# Altium PCB Devkit_board.PcbDoc
Units mil, origin at the board's own origin, x right, y up, seen from the top; angles counter-clockwise.
Board outline 5015 x 5010 mil, 4 copper layers (Top Layer, GND02, PWR03, Bottom Layer), stack 23.756 mil thick; 83 components, 55 nets, 413 pads, 0 vias.
Unrouted connection lines stored in the file: 203.
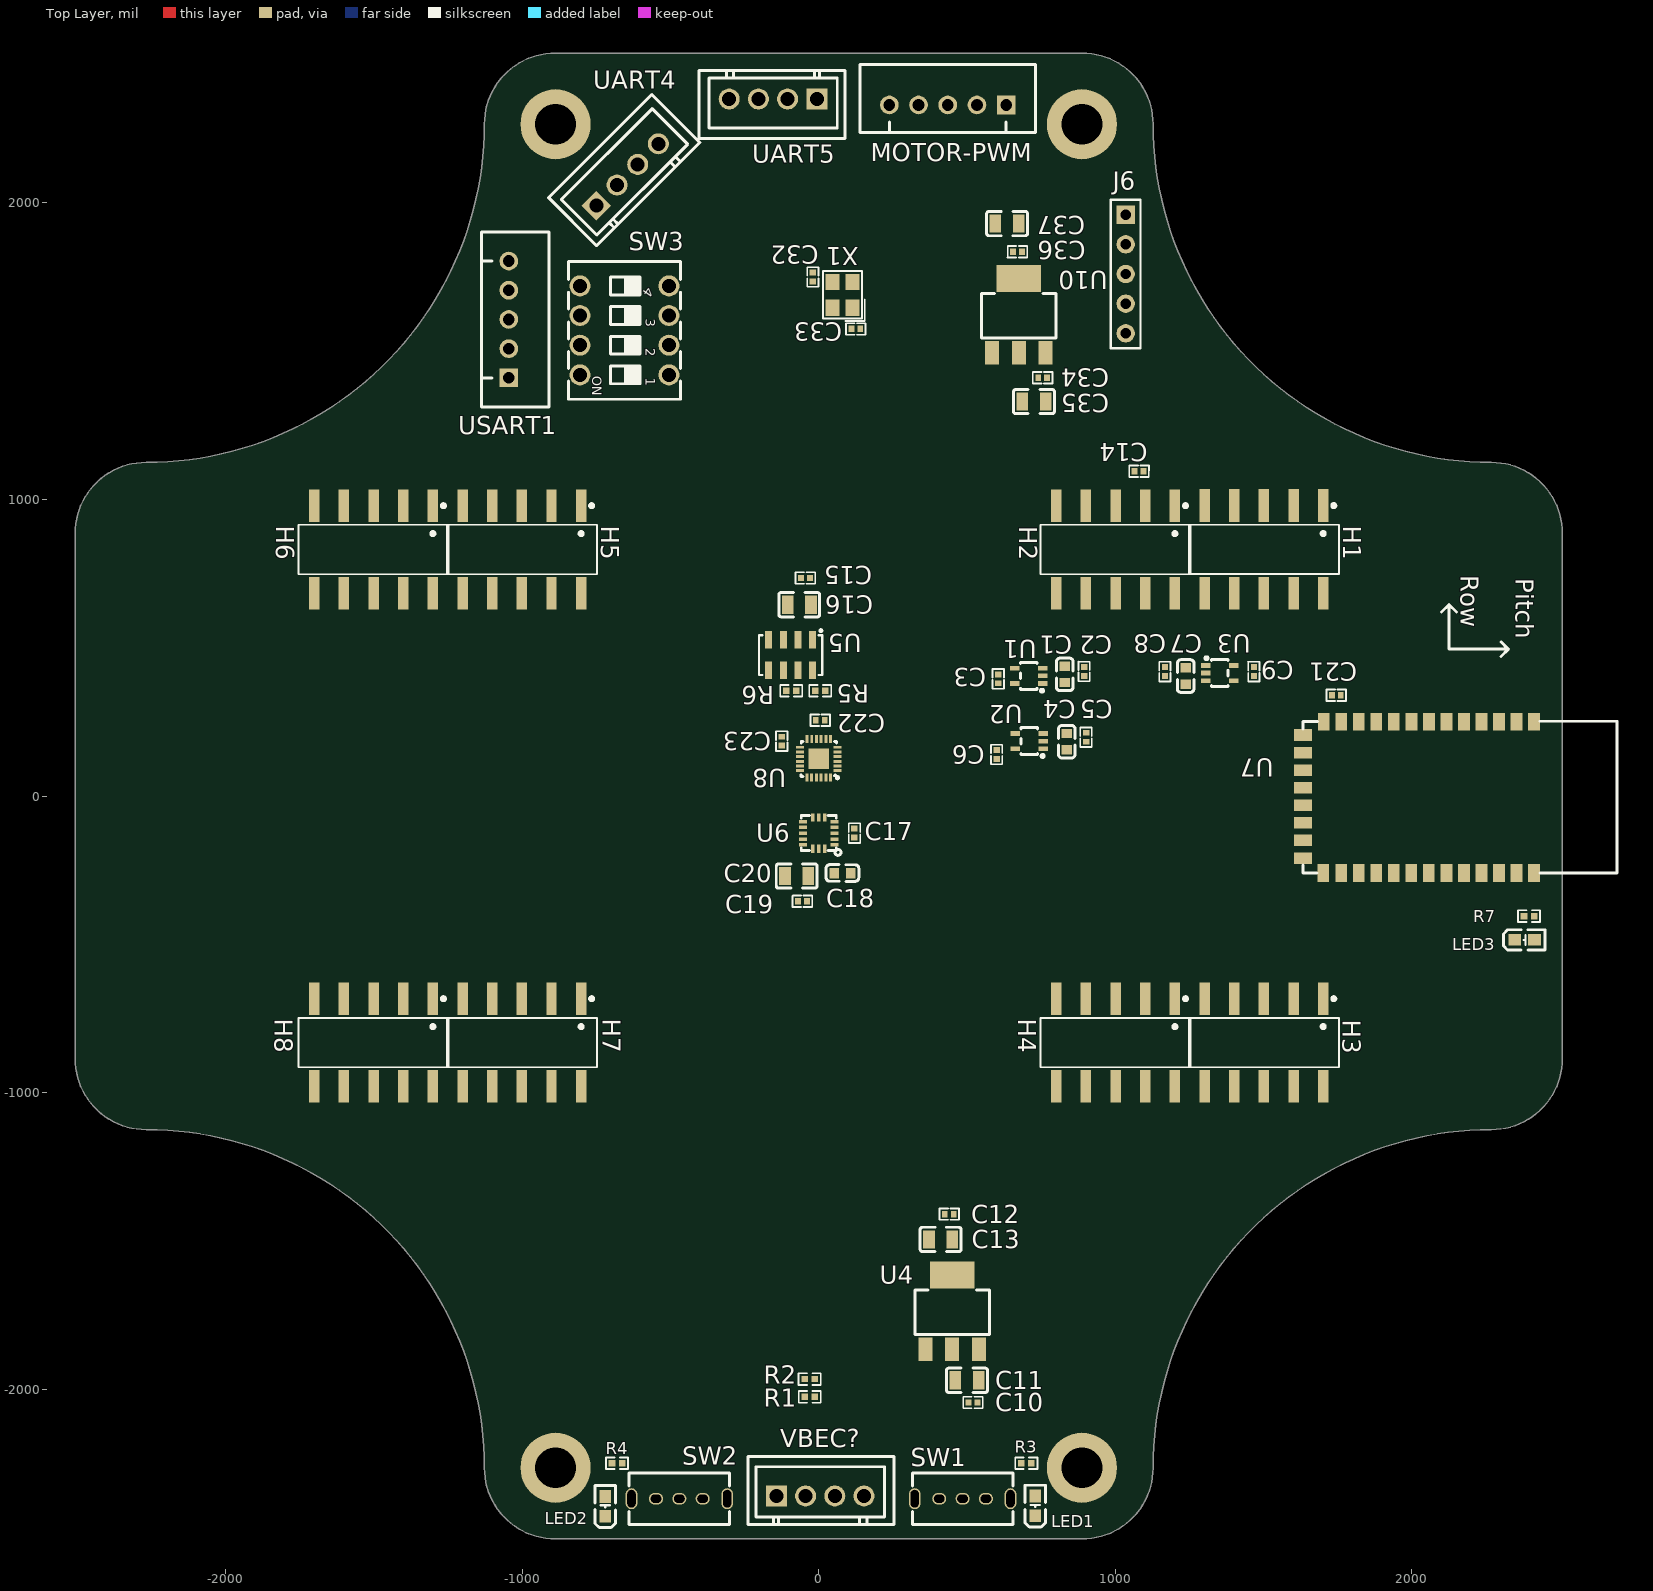
[diagram p0: Top Layer view]
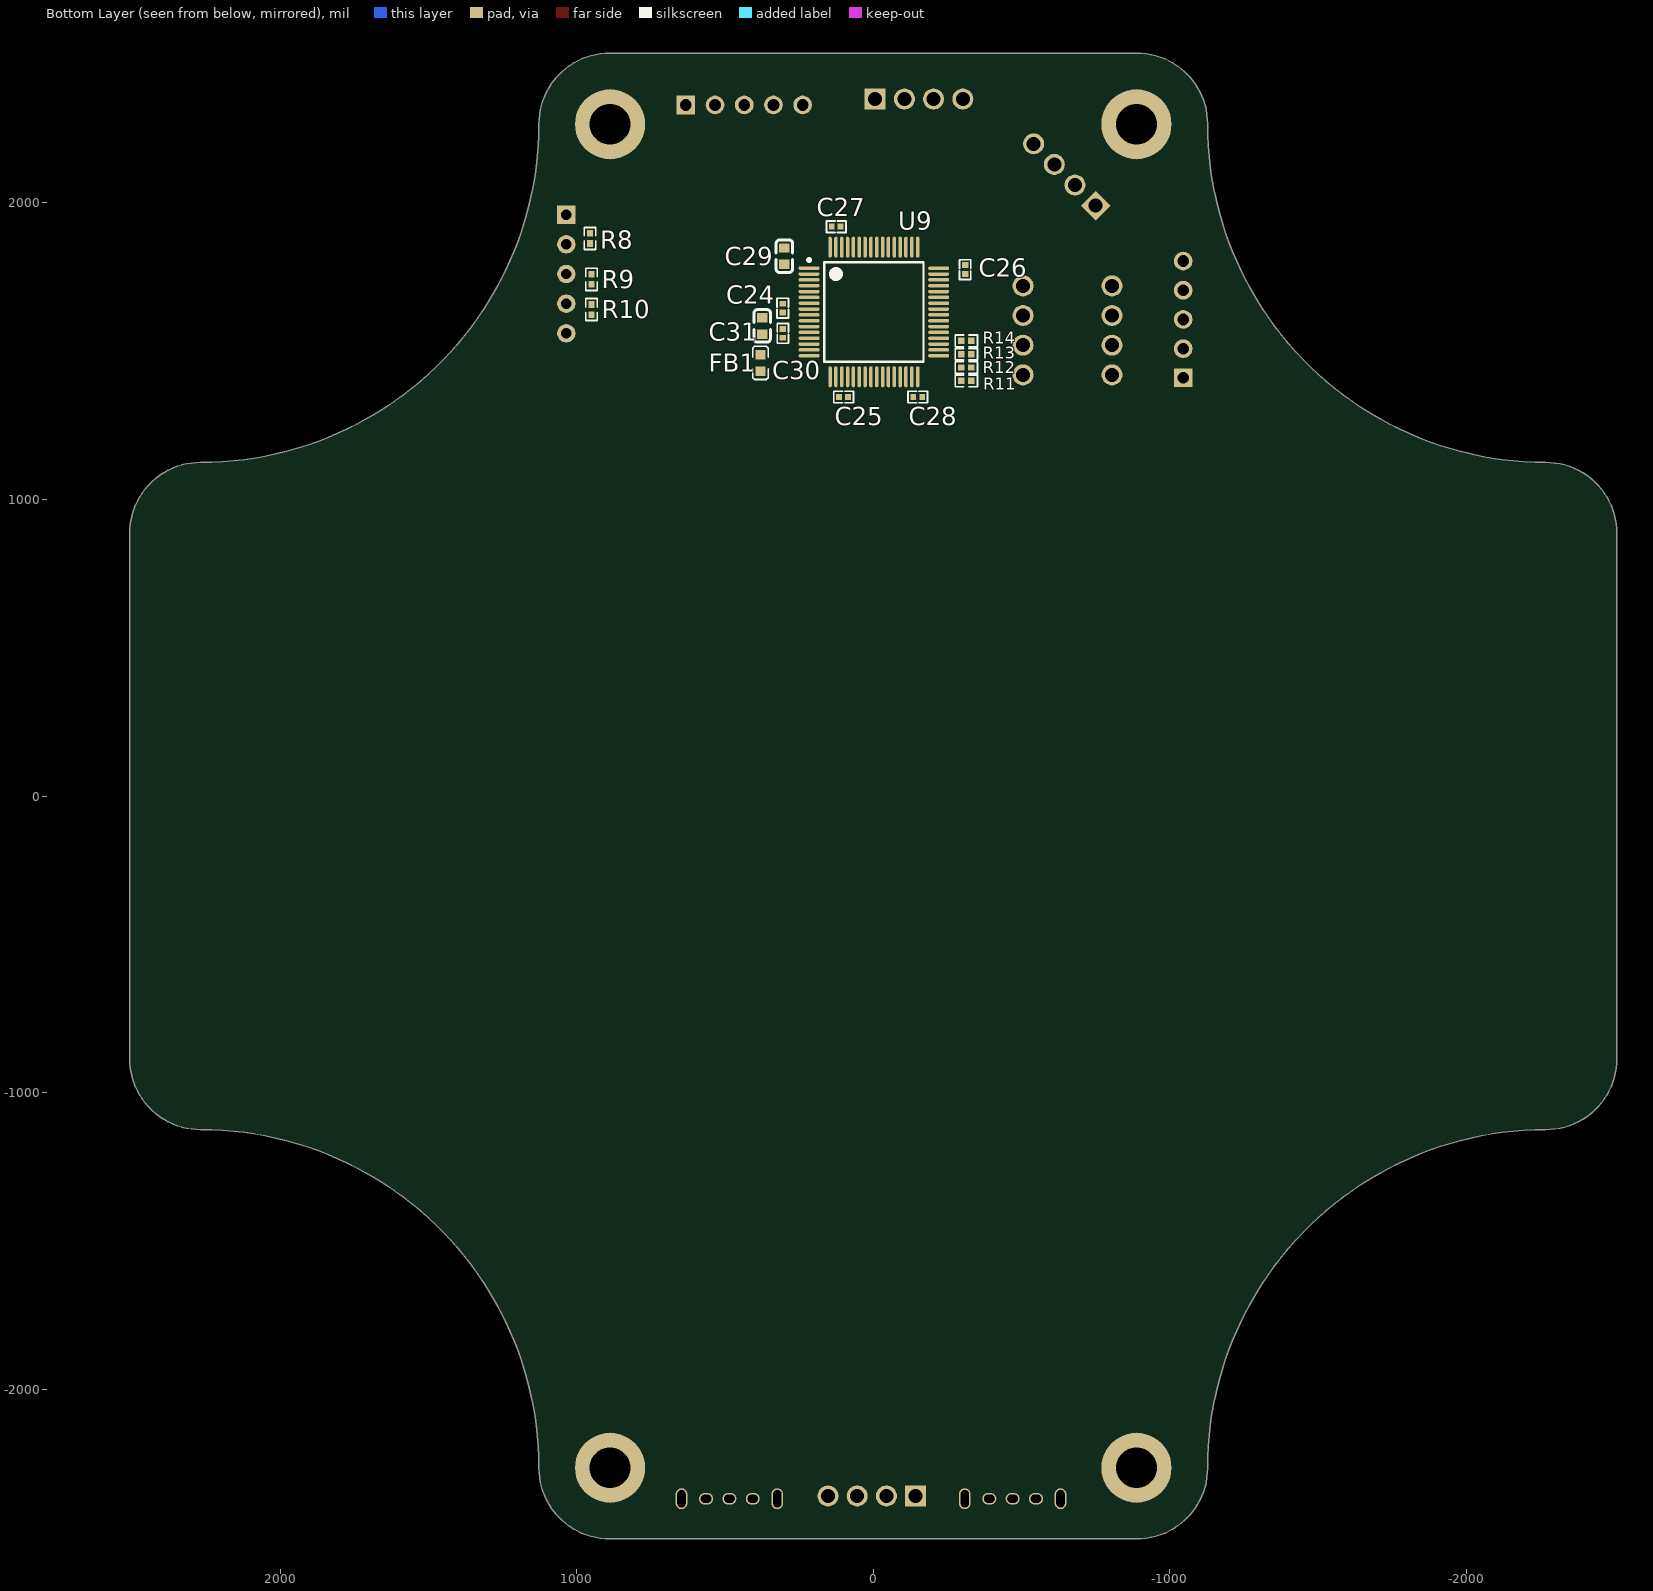
[diagram p1: Bottom Layer view, seen from below]
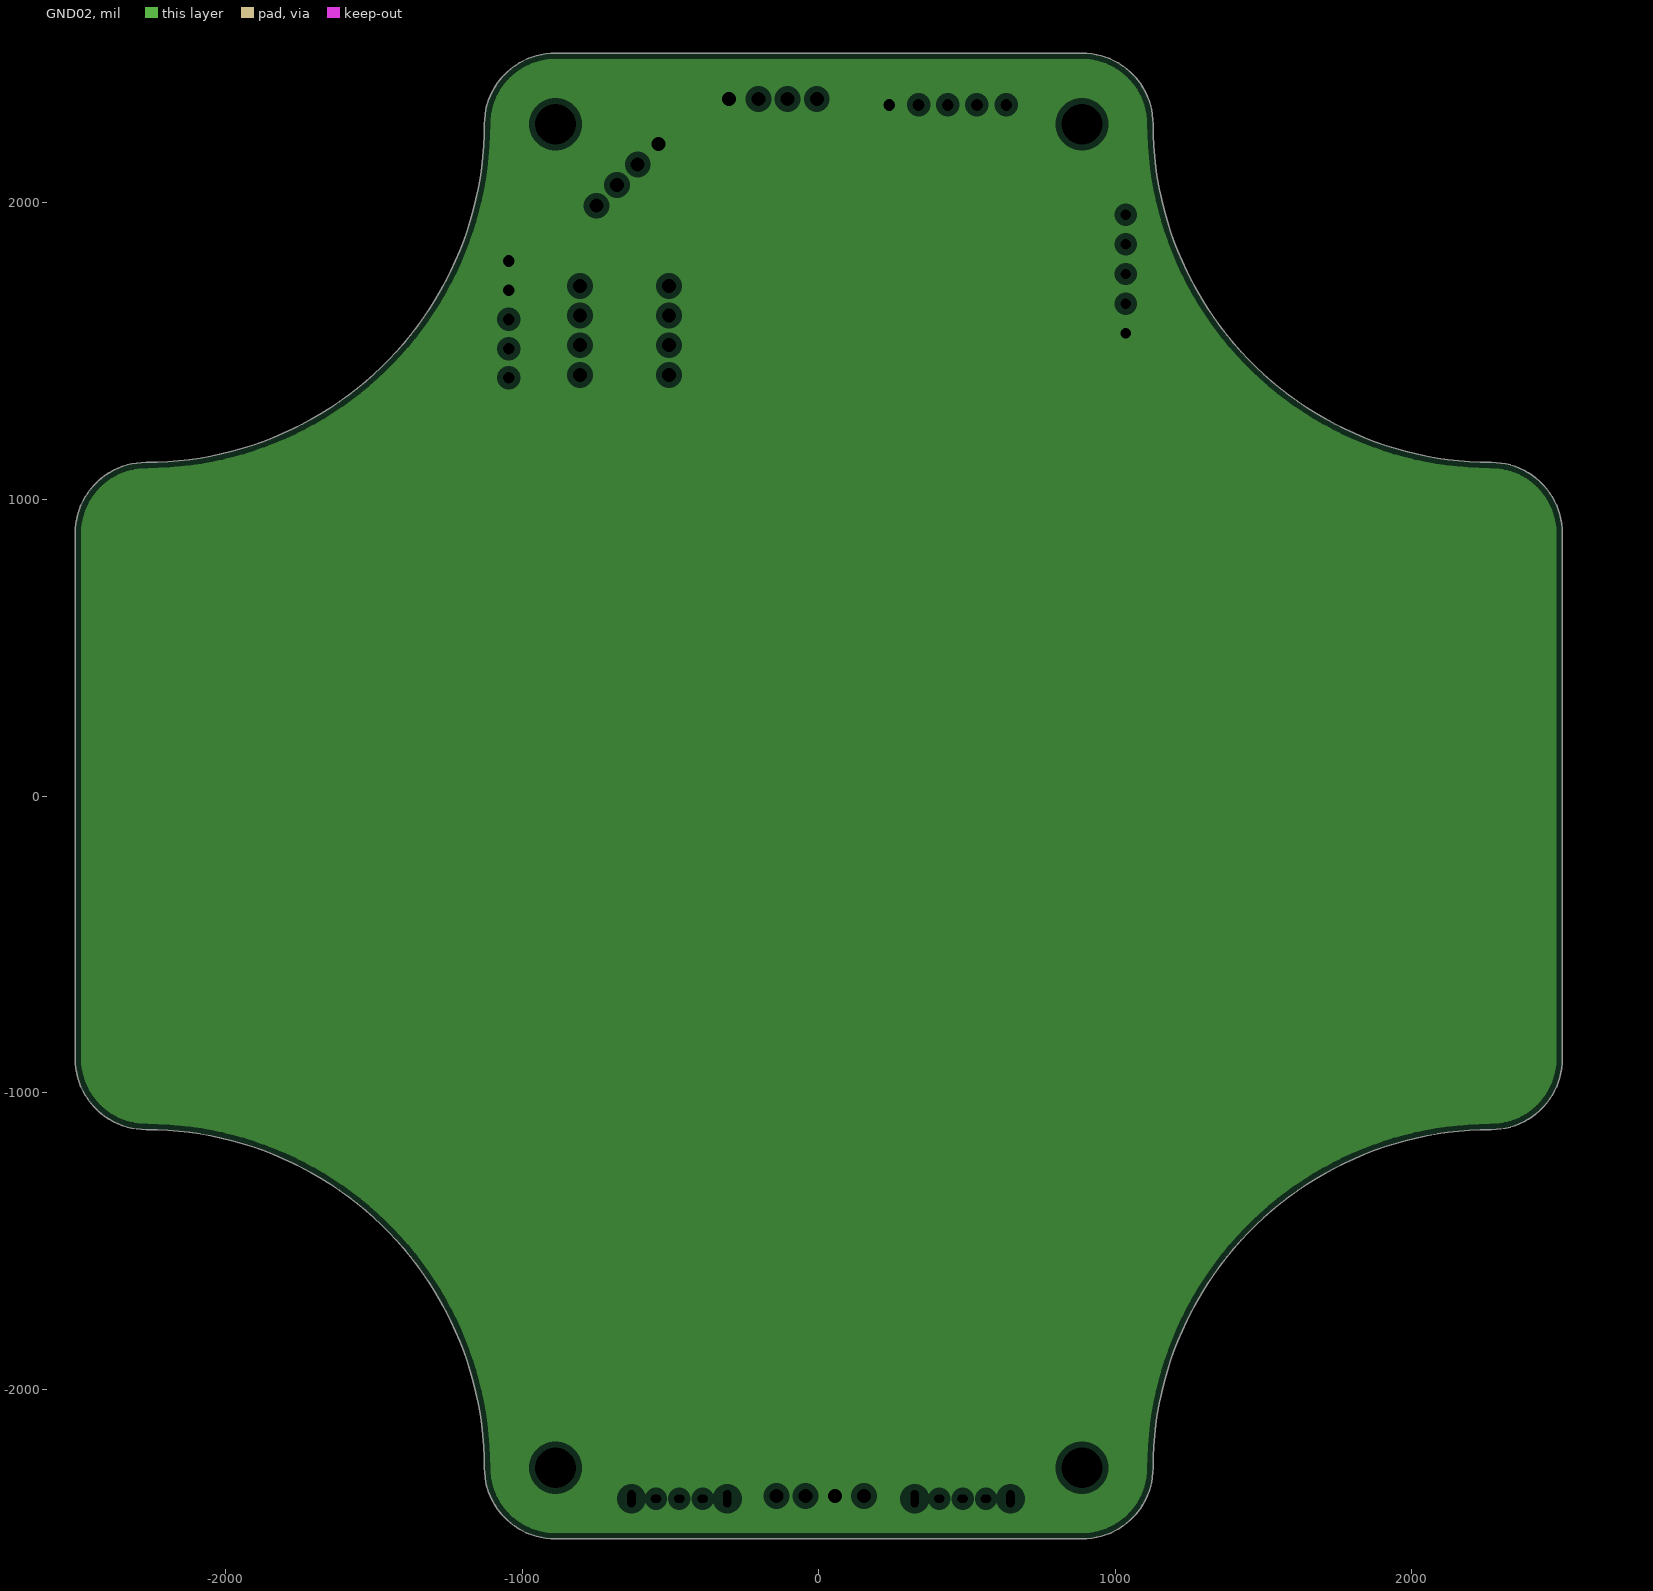
[diagram p2: GND02, clearances drawn from the general rule]
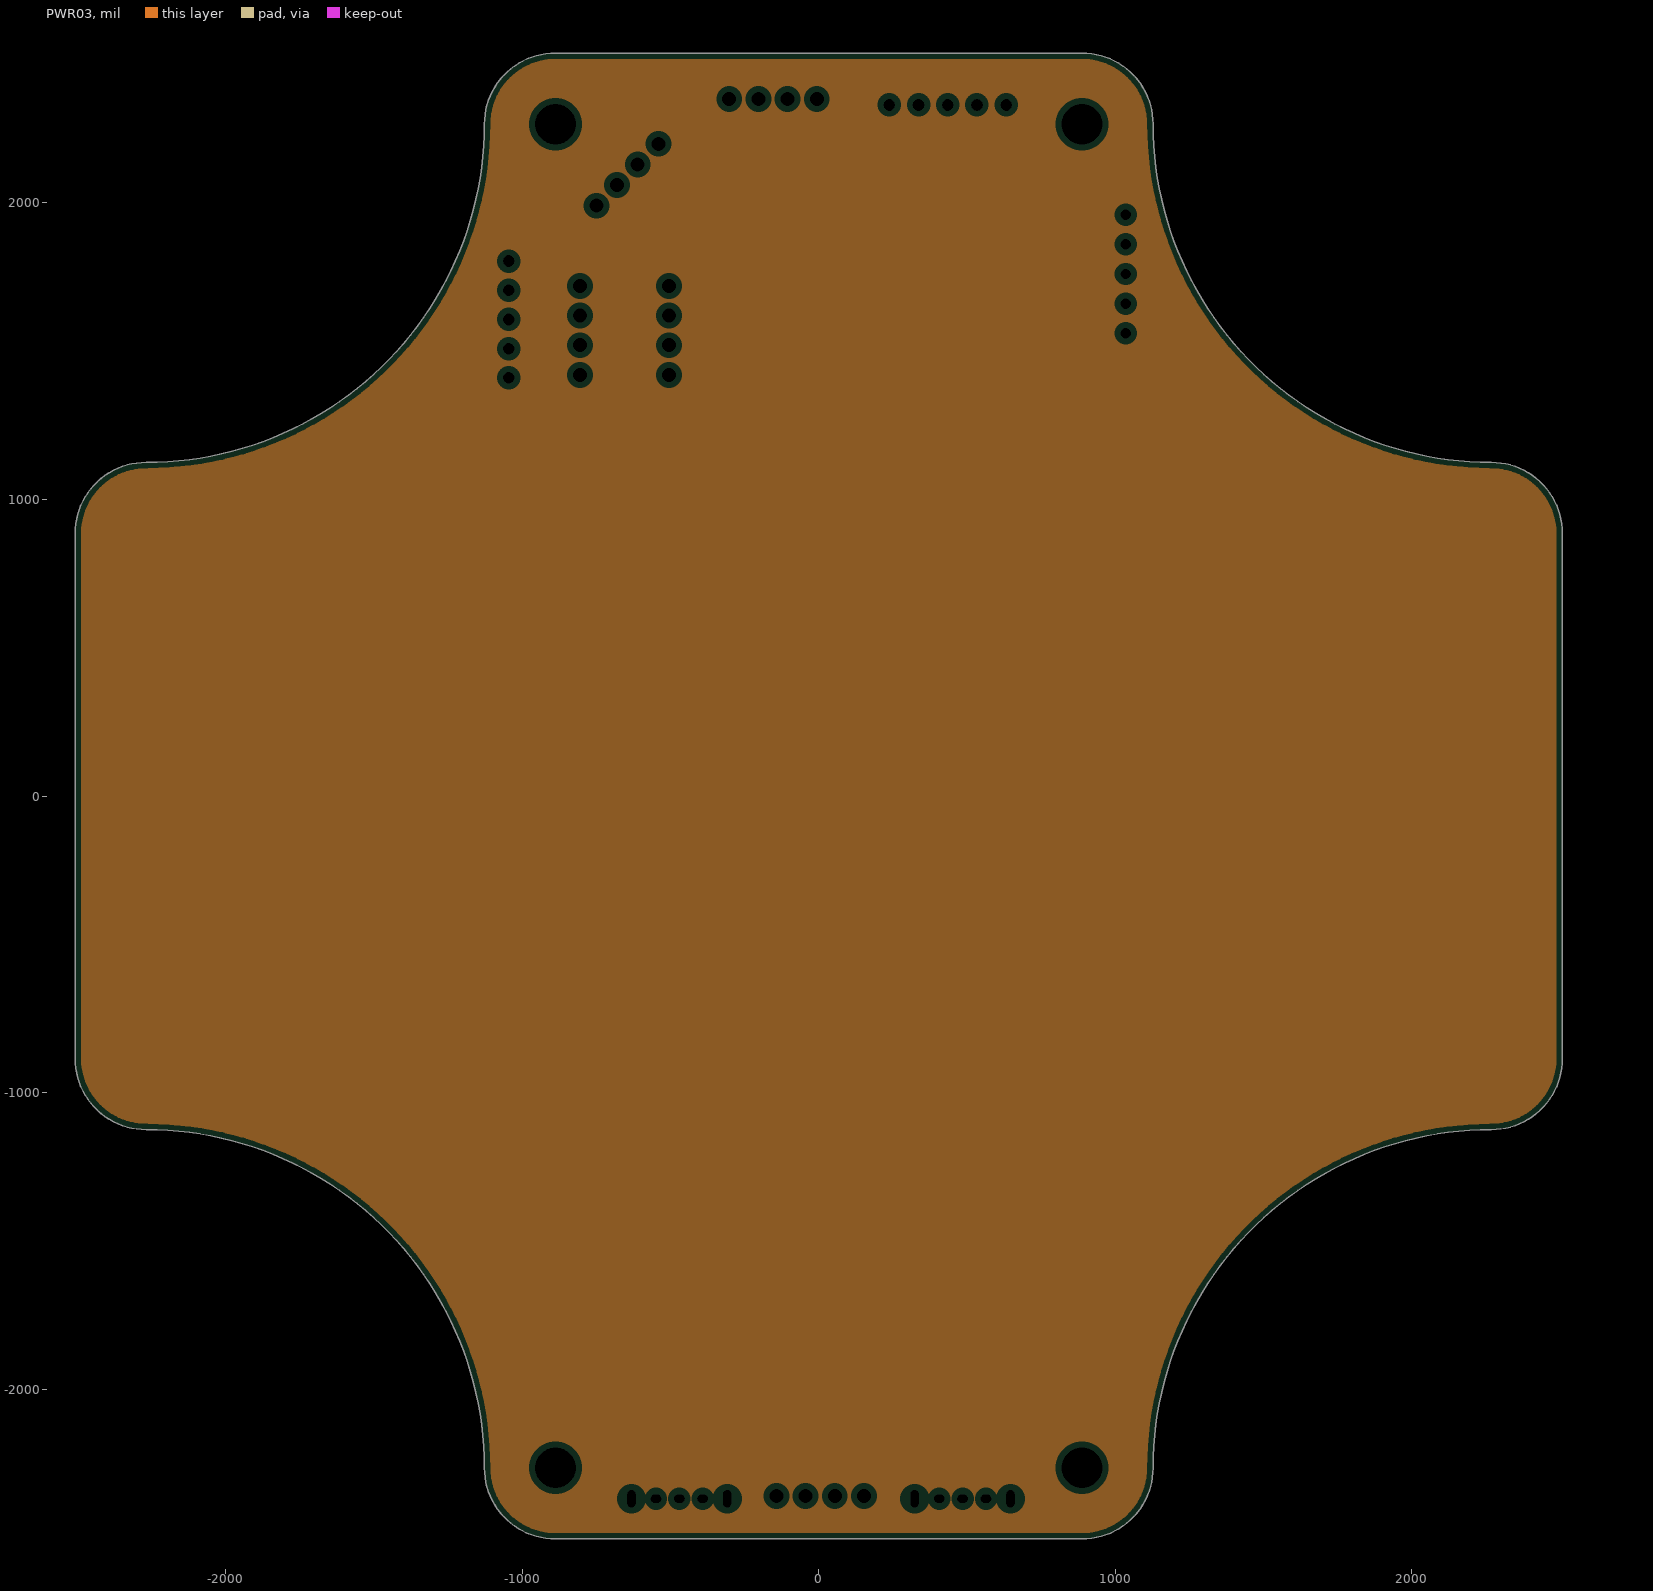
[diagram p3: PWR03, clearances drawn from the general rule]

## Layer stack, top to bottom
Top Solder: solder mask 0.4, Solder Resist, Dk 3.5
Top Layer: signal copper 1.4
Dielectric 2: prepreg 2.8, PP-006, Dk 4.1
GND02: plane copper 1.378, net GND
Dielectric 1: dielectric 12.6, FR-4, Dk 4.8
PWR03: plane copper 1.378
Dielectric 3: prepreg 2.8, PP-006, Dk 4.1
Bottom Layer: signal copper 1.4
Bottom Solder: solder mask 0.4, Solder Resist, Dk 3.5

## Board outline
-1127.5,-2265 ccw(c-887.5,-2265) -887.5,-2505 887.5,-2505 ccw(c887.5,-2265) 1127.5,-2265 cw(c2267.5,-2265) 2267.5,-1125 ccw(c2267.5,-885) 2507.5,-885 2507.5,885 ccw(c2267.5,885) 2267.5,1125 cw(c2267.5,2265) 1127.5,2265 ccw(c887.5,2265) 887.5,2505 -887.5,2505 ccw(c-887.5,2265) -1127.5,2265 cw(c-2267.5,2265) -2267.5,1125 ccw(c-2267.5,885) -2507.5,885 -2507.5,-885 ccw(c-2267.5,-885) -2267.5,-1125 cw(c-2267.5,-2265)

## Design rules (kind name [scope] priority, off if disabled: settings)
Clearance Clearance_1 [All] p1: gap=10 ignorepadtopadclearanceinfootprint=FALSE except(0: Arc-Hole Track-Hole SMDPad-Hole THPad-Hole Via-Hole Fill-Hole Poly-Hole Region-Hole Text-Hole)
Clearance [All] p2: gap=10 ignorepadtopadclearanceinfootprint=FALSE except(0: Arc-Hole Track-Hole SMDPad-Hole THPad-Hole Via-Hole Fill-Hole Poly-Hole Region-Hole Text-Hole)
PlaneClearance [All] p1: clearance=20
PlaneConnect [All] p1: planeconnectstyle=Relief reliefexpansion=20 reliefentries=4 reliefconductorwidth=10 reliefairgap=10
PolygonConnect [All] p1: connectstyle=Relief reliefconductorwidth=10 reliefentries=4 polygonreliefangle="90 Angle" airgapwidth=10
RoutingVias [All] p1: holewidth=28 width=50 viastyle="Through Hole" minholewidth=28 minwidth=50 maxholewidth=28 maxwidth=50
SolderMaskExpansion [All] p1: expansion=4 istentingtop=FALSE
Width [All] p1: maxlimit=10 minlimit=10 preferedwidth=10
28 further rules are at their usual default settings.

## Classes and differential pairs
component class stm32_core: C24 C25 C26 C27 C28 C29 C30 C31 C32 C33 C34 C35 C36 C37 FB1 J6 R8 R9 R10 R11 R12 R13 R14 SW3 U9 U10 UART4 UART5 USART1 X1
component class IMU: C1 C2 C3 C4 C5 C6 C7 C8 C9 C10 C11 C12 C13 C14 C15 C16 C17 C18 C19 C20 C21 C22 C23 H1 H2 H3 H4 H5 H6 H7 H8 LED1 LED2 LED3 MOTOR-PWM R1 R2 R3 R4 R5 R6 R7 SW1 SW2 U1 U2 U3 U4 U5 U6 U7 U8 VBEC?

## Components (designator, comment, footprint, x,y, rotation, side; value= is the part's Value field where it differs from the comment)
C1 "4.7uF" C0603 830,410 r90 top
C2 "100nF" C0402 895,420 r90 top
C3 "1uF" C0402 605,395 r270 top
C4 "4.7uF" C0603 836.51,183.15 r90 top
C5 "100nF" C0402 901.51,198.15 r90 top
C6 "1uF" C0402 600,140 r90 top
C7 "4.7uF" C0603 1237.44,404.52 r90 top
C8 "100nF" C0402 1167.44,419.52 r90 top
C9 "1uF" C0402 1467.44,419.52 r90 top
C10 "100nF" C0402 520,-2045 r0 top
C11 "10uF" C0805 500,-1970 r0 top
C12 "100nF" C0402 440,-1410 r0 top
C13 "10uF" C0805 410.94,-1495 r0 top
C14 "100nF" C0402 1080,1095 r0 top
C15 "100nF" C0402 -45,735 r0 top
C16 "10uF" C0805 -65.63,645 r0 top
C17 "220nF" C0402 120,-125 r270 top
C18 "4.7uF" C0603 80,-260 r0 top
C19 "100nF" C0402 -55,-355 r0 top
C20 "10uF" C0805 -74.37,-270 r0 top
C21 "100nF" C0402 1745,340 r180 top
C22 "100nF" C0402 5,255 r0 top
C23 "1uF" C0402 -125,185 r270 top
C24 "100nF" C0402 305,1645 r90 bottom
C25 "100nF" C0402 100,1345 r180 bottom
C26 "100nF" C0402 -310,1775 r90 bottom
C27 "100nF" C0402 125,1920 r0 bottom
C28 "100nF" C0402 -150,1345 r180 bottom
C29 "22uF" C0603 300,1820 r270 bottom
C30 "100nF" C0402 305,1560 r270 bottom
C31 "22uF" C0603 375,1585 r270 bottom
C32 "12pF" C0402 -20,1750 r270 top
C33 "12pF" C0402 125,1575 r180 top
C34 "100nF" C0402 755,1410 r0 top
C35 "10uF" C0805 725.63,1330 r0 top
C36 "100nF" C0402 670,1835 r0 top
C37 "10uF" C0805 635,1930 r0 top
FB1 "100Ω" L0603 380,1460 r90 bottom
H1 "95278-101A10LF" HDR-SMD_10P-P2.54-V-R2-C5-S7.3 1501.02,831.34 r180 top
H2 "95278-101A10LF" HDR-SMD_10P-P2.54-V-R2-C5-S7.3 1001.02,831.14 r180 top
H3 "95278-101A10LF" HDR-SMD_10P-P2.54-V-R2-C5-S7.3 1501.02,-831.18 r180 top
H4 "95278-101A10LF" HDR-SMD_10P-P2.54-V-R2-C5-S7.3 1001.02,-831.18 r180 top
H5 "95278-101A10LF" HDR-SMD_10P-P2.54-V-R2-C5-S7.3 -1001.02,831.14 r180 top
H6 "95278-101A10LF" HDR-SMD_10P-P2.54-V-R2-C5-S7.3 -1501.02,831.14 r180 top
H7 "95278-101A10LF" HDR-SMD_10P-P2.54-V-R2-C5-S7.3 -1001.02,-831.18 r180 top
H8 "95278-101A10LF" HDR-SMD_10P-P2.54-V-R2-C5-S7.3 -1501.02,-831.18 r180 top
J6 "HDR-M-2.54_1x5" HDR-M-2.54_1X5 1035,1760 r270 top
LED1 "19-217/BHC-ZL1M2RY/3T" LED0603-R-RD 730,-2393.5 r90 top
LED2 "19-217/BHC-ZL1M2RY/3T" LED0603-R-RD -720,-2395 r90 top
LED3 "19-217/BHC-ZL1M2RY/3T" LED0603-R-RD 2380,-485 r0 top
MOTOR-PWM "XH-5A" CONN-TH_5P-P2.50_XH-5A_C2318 435,2330 r180 top
R1 "3.9M" R0402 -30.32,-2025.95 r0 top
R2 "1M" R0402 -30.63,-1965.95 r0 top
R3 "1K" R0402 700,-2250 r180 top
R4 "1K" R0402 -680,-2250 r0 top
R5 "4.7K" R0402 5,355 r0 top
R6 "4.7K" R0402 -92.96,355 r180 top
R7 "1K" R0402 2395,-405 r180 top
R8 "10K" R0402 955,1880 r90 bottom
R9 "10K" R0402 950,1742.04 r270 bottom
R10 "10K" R0402 950,1640 r270 bottom
R11 "10K" R0402 -313.91,1399.63 r0 bottom
R12 "10K" R0402 -313.91,1444.63 r0 bottom
R13 "10K" R0402 -313.91,1489.63 r0 bottom
R14 "10K" R0402 -313.91,1534.63 r0 bottom
SW1 "主控电源开关" SW-TH_SK-12D02VG3 485,-2369.39 r0 top
SW2 "视觉电源开关" SW-TH_SK-12D02VG3 -470,-2369.39 r0 top
SW3 "DSWB04LHGET" SW-TH_DSWB04LHGET -655,1570 r90 top
U1 "TLV70033" SC-70-5_L2.1-W1.3-P0.65-LS2.1-BR 707.76,405 r0 top
U2 "TLV70033" SC-70-5_L2.1-W1.3-P0.65-LS2.1-BR 710,185 r0 top
U3 "TLV70033" SC-70-5_L2.1-W1.3-P0.65-LS2.1-BR 1352.44,414.52 r180 top
U4 "TLV1117-3.3V" SOT-223-4_L6.5-W3.5-P2.30-LS7.0-BR 450,-1740 r270 top
U5 "MS5611-01BA03" SENSORS-SMD_MS5611-01BA03 -95,475 r270 top
U6 "LSM303D" LGA16-0.5-3X3MM 0,-125 r180 top
U7 "HC06" "HC-06 MODULE" 1633.1,-209.8 r180 top
U8 "MPU6500" QFN-24_L3.0-W3.0-P0.40-BL-EP 0.05,126.95 r90 top
U9 "STM32F103RCT6" STM-LQFP64_N -2.06,1632.06 r180 bottom
U10 "TLV1117-3.3V" SOT-223-4_L6.5-W3.5-P2.30-LS7.0-BR 674.45,1620 r270 top
UART4 "XH-4A" CONN-TH_4P-P2.50_XH-4A -645.25,2094.75 r45 top
UART5 "XH-4A" CONN-TH_4P-P2.50_XH-4A -154.15,2350 r180 top
USART1 "XH-5A" CONN-TH_5P-P2.50_XH-5A_C2318 -1045,1606.85 r90 top
VBEC? "XH-4A" CONN-TH_4P-P2.50_XH-4A 4.84,-2360 r0 top
X1 "8MHz" OSC-SMD_4P-L3.2-W2.5-BL 80,1690 r90 top

## Footprints (in the part's own frame and the unit in brackets; to place one, negate y for a bottom-side part, rotate by r counter-clockwise, add the part's x,y. Pads: shape width x height; smd on the part's side, far side on the other; paste and mask are expansions set on the pad)
C0402 [mm]
  rect 0.5x0.54 smd: 1(-0.381,0) 2(0.381,0)
  silkscreen extent -0.84,-0.48 0.84,0.5
C0603 [mm]
  rect 0.8x0.9 smd: 1(-0.7,0) 2(0.7,0)
  silkscreen extent -1.4,-0.7 1.4,0.72
C0805 [mm]
  rect 1x1.55 smd: 1(-1,0) 2(1,0)
  silkscreen extent -1.75,-1.04 1.75,1.04
CONN-TH_4P-P2.50_XH-4A [mm]
  rect 1.8x1.8 hole 1.199: 1(-3.75,0)
  round 1.8 hole 1.199: 2(-1.248,0) 3(1.251,0) 4(3.75,0)
  silkscreen extent -6.17,-2.44 6.33,3.38
CONN-TH_5P-P2.50_XH-5A_C2318 [mm]
  rect 1.6x1.6 hole 1: 1(-5,0)
  round 1.6 hole 1: 2(-2.5,0) 3(0,0) 4(2.5,0) 5(5,0)
  silkscreen extent -7.5,-3.45 7.5,2.35
"HC-06 MODULE" [mil]
  rect 39.37x60 smd: 1(-778.75,-460.1) 2(-719.65,-460.1) 3(-660.65,-460.1) 4(-601.55,-460.1) 5(-542.55,-460.1) 6(-483.45,-460.1) 7(-424.35,-460.1) 8(-365.25,-460.1) 9(-306.2,-460.1) 10(-247.1,-460.1) 11(-188.1,-460.1) 12(-129,-460.1) 13(-69.9,-460.1) 22(-67.55,49.8) 23(-128.8,50.2) 24(-187.9,50.2) 25(-246.9,50.2) 26(-306,50.2) 27(-365.05,50.2) 28(-424.15,50.2) 29(-483.25,50.2) 30(-542.35,50.2) 31(-601.4,50.2) 32(-660.35,50.2) 33(-719.35,50.2) 34(-778.45,50.2)
  rect 60x39.37 smd: 14(0.2,-415.25) 15(0.3,-356.05) 16(0.2,-297) 17(0.2,-237.95) 18(0.2,-178.9) 19(0.2,-119.85) 20(0.2,-60.8) 21(0.2,0.15)
  silkscreen extent -1058,-462 0,50
HDR-M-2.54_1X5 [mil]
  rect 62x62 hole 35: 1(-200,0)
  round 62 hole 35: 2(-100,0) 3(0,0) 4(100,0) 5(200,0)
  silkscreen extent -250,-50 250,50
HDR-SMD_10P-P2.54-V-R2-C5-S7.3 [mil]
  rect 35.28x110.94 smd: 1(-200,-147.6) 2(-100,-147.6) 3(0,-147.6) 4(100,-147.6) 5(200,-147.6) 6(200,147.6) 7(100,147.6) 8(0,147.6) 9(-100,147.6) 10(-200,147.6)
  silkscreen extent -253,-154 253,83
L0603 [mm]
  rect 0.8x0.864 smd: 1(-0.7,0) 2(0.7,0)
  silkscreen extent -1.41,-0.65 1.43,0.67
LED0603-R-RD [mil]
  rect 43x39 smd: 1(33.5,0) 2(-33.5,0)
  silkscreen extent -72,-34 70,34
LGA16-0.5-3X3MM [mil]
  rect 27.6x11.8 smd: 1(-53,39) 2(-53,20) 3(-53,0) 4(-53,-20) 5(-53,-39) 9(53,-39) 10(53,-20) 11(53,0) 12(53,20) 13(53,39)
  rect 11.8x27.6 smd: 6(-20,-53) 7(0,-53) 8(20,-53) 14(20,53) 15(0,53) 16(-20,53)
  silkscreen extent -75,-59 59,75
OSC-SMD_4P-L3.2-W2.5-BL [mm]
  rect 1.4x1.2 smd: 1(-1.1,-0.85) 2(1.1,-0.85) 3(1.1,0.85) 4(-1.1,0.85)
  silkscreen extent -2.26,-1.91 2.03,1.68
QFN-24_L3.0-W3.0-P0.40-BL-EP [mil]
  rect 10x27.56 smd: 1(-41.35,-63.05) 2(-25.55,-62.95) 3(-9.85,-63.05) 4(5.95,-63.05) 5(21.75,-63.05) 6(37.45,-63.05) 13(37.45,63.05) 14(21.75,63.05) 15(5.85,62.95) 16(-9.85,63.05) 17(-25.65,63.05) 18(-41.25,62.95)
  rect 27.56x10 smd: 7(65.05,-39.35) 8(65.05,-23.65) 9(65.05,-7.85) 10(65.05,7.95) 11(64.95,23.65) 12(64.95,39.45) 19(-65.05,39.45) 20(-65.05,23.75) 21(-65.05,7.95) 22(-65.05,-7.85) 23(-65.05,-23.65) 24(-65.05,-39.35)
  rect 68.9x68.9 smd: 25(-1.95,0.05)
  silkscreen extent -69,-67 57,59
R0402 [mm]
  rect 0.566x0.54 smd: 1(-0.433,0) 2(0.433,0)
  silkscreen extent -0.94,-0.5 0.94,0.5
SC-70-5_L2.1-W1.3-P0.65-LS2.1-BR [mm]
  rect 0.8x0.4 smd: 1(1.2,-0.65) 2(1.2,0) 3(1.2,0.65) 4(-1.2,0.65) 5(-1.2,-0.65)
  silkscreen extent -0.7,-1.4 1.27,1.15
SENSORS-SMD_MS5611-01BA03 [mm]
  rect 1.5x0.6 smd: 1(-1.3,1.875) 2(-1.3,0.625) 3(-1.3,-0.625) 4(-1.3,-1.875) 5(1.3,-1.875) 6(1.3,-0.625) 7(1.3,0.625) 8(1.3,1.875)
  silkscreen extent -2.18,-2.7 1.7,2.7
SOT-223-4_L6.5-W3.5-P2.30-LS7.0-BR [mm]
  rect 2x1.2 smd: 1(3.175,-2.3) 2(3.175,0) 3(3.175,2.3)
  rect 2.3x3.8 smd: 4(-3.175,0)
  silkscreen extent -1.87,-3.2 1.93,3.2
STM-LQFP64_N [mm] "Thin QFP, 64-Leads, Body 10x10mm, Pitch 0.5mm, IPC Medium Density"
  oval 1.8x0.3 smd: 1(-5.55,3.75) 2(-5.55,3.25) 3(-5.55,2.75) 4(-5.55,2.25) 5(-5.55,1.75) 6(-5.55,1.25) 7(-5.55,0.75) 8(-5.55,0.25) 9(-5.55,-0.25) 10(-5.55,-0.75) 11(-5.55,-1.25) 12(-5.55,-1.75) 13(-5.55,-2.25) 14(-5.55,-2.75) 15(-5.55,-3.25) 16(-5.55,-3.75) 33(5.55,-3.75) 34(5.55,-3.25) 35(5.55,-2.75) 36(5.55,-2.25) 37(5.55,-1.75) 38(5.55,-1.25) 39(5.55,-0.75) 40(5.55,-0.25) 41(5.55,0.25) 42(5.55,0.75) 43(5.55,1.25) 44(5.55,1.75) 45(5.55,2.25) 46(5.55,2.75) 47(5.55,3.25) 48(5.55,3.75)
  oval 0.3x1.8 smd: 17(-3.75,-5.55) 18(-3.25,-5.55) 19(-2.75,-5.55) 20(-2.25,-5.55) 21(-1.75,-5.55) 22(-1.25,-5.55) 23(-0.75,-5.55) 24(-0.25,-5.55) 25(0.25,-5.55) 26(0.75,-5.55) 27(1.25,-5.55) 28(1.75,-5.55) 29(2.25,-5.55) 30(2.75,-5.55) 31(3.25,-5.55) 32(3.75,-5.55) 49(3.75,5.55) 50(3.25,5.55) 51(2.75,5.55) 52(2.25,5.55) 53(1.75,5.55) 54(1.25,5.55) 55(0.75,5.55) 56(0.25,5.55) 57(-0.25,5.55) 58(-0.75,5.55) 59(-1.25,5.55) 60(-1.75,5.55) 61(-2.25,5.55) 62(-2.75,5.55) 63(-3.25,5.55) 64(-3.75,5.55)
  silkscreen extent -5.68,-4.25 4.25,4.57, body extent -5,-5 5,5, height 1.6
SW-TH_DSWB04LHGET [mm]
  round 1.8 hole 1.2: 1(-3.81,3.81) 2(-1.27,3.81) 3(1.27,3.81) 4(3.81,3.81) 5(-3.81,-3.81) 6(-1.27,-3.81) 7(1.27,-3.81) 8(3.81,-3.81)
  silkscreen extent -5.9,-4.8 5.9,4.8
SW-TH_SK-12D02VG3 [mm]
  oval 1.2x1 hole 0.7 slot 0.9 at 0 deg: 1(-2,0) 2(0,0) 3(2,0)
  oval 1x1.8 hole 0.7 slot 1.5 at 90 deg: 4(4.1,0) 5(-4.1,0)
  silkscreen extent -4.3,-2.2 4.3,2.2

## Part data
C1 C4 C7 C18: BOM_Manufacturer="Taiyo Yuden", BOM_Manufacturer Part=TMK107BBJ475KA-T, BOM_Supplier=LCSC, BOM_Supplier Part=C268021, Contributor=LCSC, nameAlias=Capacitance, spicePre=C, spiceSymbolName=TMK107BBJ475KA-T
C2 C5 C8 C10 C12 C14 C15 C19 C21 C22 C24 C25 C26 C27 C28 C30 C34 C36: BOM_Manufacturer="Taiyo Yuden", BOM_Manufacturer Part=TMK105B7104KVHF, BOM_Supplier=LCSC, BOM_Supplier Part=C386075, Contributor=LCSC, nameAlias=Capacitance, spicePre=C, spiceSymbolName=TMK105B7104KVHF
C3 C6 C9 C23: BOM_Manufacturer="TAIYO YUDEN", BOM_Manufacturer Part=EMK105BJ105KV-F, BOM_Supplier=LCSC, BOM_Supplier Part=C92755, nameAlias=Capacitance, spicePre=C, spiceSymbolName=EMK105BJ105KV-F
C11 C13 C16 C20 C35 C37: BOM_Manufacturer="Taiyo Yuden", BOM_Manufacturer Part=TMK212BBJ106KG-T, BOM_Supplier=LCSC, BOM_Supplier Part=C386085, Contributor=LCSC, nameAlias=Capacitance, spicePre=C, spiceSymbolName=TMK212BBJ106KG-T
C17: BOM_Manufacturer="TAIYO YUDEN", BOM_Manufacturer Part=EMK105B7224KV-FR, BOM_Supplier=LCSC, BOM_Supplier Part=C92754, nameAlias=Capacitance, spicePre=C, spiceSymbolName=EMK105B7224KV-FR
C29 C31: BOM_Manufacturer="Taiyo Yuden", BOM_Manufacturer Part=LDK107BBJ226MA-T, BOM_Supplier=LCSC, BOM_Supplier Part=C337440, Contributor=LCSC, nameAlias=Capacitance, spicePre=C, spiceSymbolName=LDK107BBJ226MA-T
C32 C33: BOM_Manufacturer="TAIYO YUDEN", BOM_Manufacturer Part=UMK105CG120JV-F, BOM_Supplier=LCSC, BOM_Supplier Part=C92842, nameAlias=Capacitance, spicePre=C, spiceSymbolName=UMK105CG120JV-F
FB1: BOM_Manufacturer=TDK, BOM_Manufacturer Part=MPZ1608D101BTA00, BOM_Supplier=LCSC, BOM_Supplier Part=C87554, nameAlias=Value, spicePre=L, spiceSymbolName=MPZ1608D101BTA00
H1 H2 H3 H4 H5 H6 H7 H8: BOM_Manufacturer="Amphenol ICC", BOM_Manufacturer Part=95278-101A10LF, BOM_Supplier=LCSC, BOM_Supplier Part=C178296, Contributor=LCSC, spicePre=H, spiceSymbolName=95278-101A10LF
LED1 LED2 LED3: BOM_JLCPCB SMD=Yes, BOM_Manufacturer=EVERLIGHT, BOM_Manufacturer Part=19-217/BHC-ZL1M2RY/3T, BOM_Supplier=LCSC, BOM_Supplier Part=C72041, image=//image.lceda.cn/szlcsc/C72041.jpg, SMT Type=Basic, spicePre=L, spiceSymbolName=19-217/BHC-ZL1M2RY/3T
MOTOR-PWM UART4 UART5 USART1 VBEC?: BOM_JLCPCB SMD=Yes, BOM_Manufacturer=BOOMELE, BOM_Supplier=LCSC, SMT Type=Extend, spicePre=C
  MOTOR-PWM USART1: BOM_Manufacturer Part=XH-5A, BOM_Supplier Part=C2318, image=//image.lceda.cn/szlcsc/C2318.jpg, spiceSymbolName=XH-5A
  UART4 UART5 VBEC?: BOM_Manufacturer Part=XH-4A, BOM_Supplier Part=C37815, image=//image.lceda.cn/szlcsc/C37815.jpg, spiceSymbolName=XH-4A
R1: BOM_Manufacturer=YAGEO, BOM_Manufacturer Part=RC0402JR-073M9L, BOM_Supplier=LCSC, BOM_Supplier Part=C137870, nameAlias="Resistance (Ohms)", spicePre=R, spiceSymbolName=RC0402JR-073M9L
R2: BOM_Manufacturer=YAGEO, BOM_Manufacturer Part=AF0402FR-071ML, BOM_Supplier=LCSC, BOM_Supplier Part=C723450, Contributor=LCSC, spicePre=R, spiceSymbolName=AF0402FR-071ML
R3 R4 R7: BOM_Manufacturer=YAGEO, BOM_Manufacturer Part=AF0402FR-071KL, BOM_Supplier=LCSC, BOM_Supplier Part=C723478, Contributor=LCSC, spicePre=R, spiceSymbolName=AF0402FR-071KL
R5 R6: BOM_Manufacturer=YAGEO, BOM_Manufacturer Part=AC0402JR-074K7L, BOM_Supplier=LCSC, BOM_Supplier Part=C144709, Contributor=LCSC, nameAlias="Resistance (Ohms)", spicePre=R, spiceSymbolName=AC0402JR-074K7L
R8 R9 R10 R11 R12 R13 R14: BOM_Manufacturer=YAGEO, BOM_Manufacturer Part=AC0402FR-0710KL, BOM_Supplier=LCSC, BOM_Supplier Part=C144807, Contributor=LCSC, nameAlias="Resistance (Ohms)", spicePre=R, spiceSymbolName=AC0402FR-0710KL
SW1 SW2: BOM_Manufacturer="Rectangular Connectors - Contacts", BOM_Manufacturer Part=SK-12D02-VG5, BOM_Supplier=LCSC, BOM_Supplier Part=C136722, Contributor=LCSC, spicePre=S, spiceSymbolName=SK-12D02-VG5
SW3: BOM_Manufacturer="Dongguan Guangzhu Industrial", BOM_Manufacturer Part=-, BOM_Assembly Type=manualWeld, BOM_Paste Type=expand, BOM_Supplier=LCSC, BOM_Supplier Part=C99418, Contributor=LCSC, spicePre=S, spiceSymbolName=DSWB04LHGET
U1 U2 U3: BOM_JLCPCB SMD=Yes, BOM_Manufacturer=TI, BOM_Manufacturer Part=TLV70033DCKR, BOM_Supplier=LCSC, BOM_Supplier Part=C47945, image=//image.lceda.cn/szlcsc/C47945.jpg, SMT Type=Extend, spicePre=X, spiceSymbolName=TLV70033DCKR
U4 U10: BOM_JLCPCB SMD=Yes, BOM_Manufacturer=TI, BOM_Manufacturer Part=TLV1117-33IDCYR, BOM_Supplier=LCSC, BOM_Supplier Part=C37359, image=//image.lceda.cn/szlcsc/C37359.jpg, SMT Type=Extend, spicePre=U, spiceSymbolName=TLV1117-33IDCYR
U5: BOM_Manufacturer=MEAS, BOM_Assembly Type=smtWeld, BOM_Manufacturer Part=MS5611-01BA03, BOM_Paste Type=expand, BOM_Supplier=LCSC, BOM_Supplier Part=C37148, image=//image.lceda.cn/szlcsc/C37148.jpg, spicePre=U, spiceSymbolName=MS5611-01BA03
U8: BOM_JLCPCB SMD=Yes, BOM_Manufacturer=InvenSense, BOM_Manufacturer Part=MPU6500, BOM_Supplier=LCSC, BOM_Supplier Part=C50278, SMT Type=Extend, spicePre=U, spiceSymbolName=MPU6500
U9: "ARM Cortex-M3 32-bit MCU, 256 KB Flash, 48 KB Internal RAM, 51 I/Os, 64-pin LQFP, -40 to 85 degC, Tray", I/Os (High Current)=51, Operating Frequency(F) (Processor speed) (MHz)=72, Supplier Part Number 1=497-9033-ND, Supply Voltage(Vcc) min (V)=2, A/D Converter="3x12-bit (16 Channel)", ComponentLink1Description="Manufacturer URL", ComponentLink1URL=http://www.st.com/web/en/home.html, ComponentLink2Description=Datasheet, ComponentLink2URL=http://www.st.com/st-web-ui/static/active/en/resource/technical/document/datasheet/CD00191185.pdf, ComponentLink3Description="Package Specification", ComponentLink3URL=http://www.st.com/st-web-ui/static/active/en/resource/technical/document/datasheet/DM00037051.pdf, Core="ARM Cortex-M3", D/A Converter="2x12-bit (2 Channel)", DatasheetVersion="Rev. 8", FLASH Size (Prog) (kB)=256, Internal RAM Size (kB)=48, Mounting Technology="Surface Mount", PackageDescription="64-Pin Low Profile Quad Flat Package, 10 x 10 mm Body, 0.5 mm Pitch", PackageReference=LQFP64, PackageVersion="Rev. 4, 06/2013", Packing=Tray, PartNumber=STM32F103RCT6, Supplier 1=Digi-Key, Supplier 2=Newark, Supplier 3=Newark, Supplier 4=Mouser, Supplier Part Number 2=01P4099, Supplier Part Number 3=57P1227, Supplier Part Number 4=511-STM32F103RCT6
X1: BOM_Manufacturer="Zhejiang Abel Elec", BOM_Manufacturer Part=TAXM8M4RDBCCT2T, BOM_Assembly Type=smtWeld, BOM_Paste Type=expand, BOM_Supplier=LCSC, BOM_Supplier Part=C400090, Contributor=LCSC, nameAlias=Frequency, spicePre=X, spiceSymbolName=TAXM8M4RDBCCT2T
J6: BOM_Supplier=LCSC, BOM_Supplier Part=C358687, Contributor=LCEDA_Lib, spicePre=J, spiceSymbolName=HDR-M-2.54_1x5
U6: BOM_Manufacturer Part=LSM303D, spicePre=U, spiceSymbolName=LSM303D
U7: BOM_Manufacturer Part=HC06, Contributor=monday, spicePre=U, spiceSymbolName=HC06

## Free pads (board coordinates)
  round 236.22 hole 137.8: 1(-887.5,-2265) 1(-887.5,2265) 1(887.5,-2265) 1(887.5,2265)

## Nets (pads, with @x,y where several pads share a name; then routed paths per layer and width w, separated by ;. In a path a pad name is that pad's centre, name@x,y a point inside that pad or via, vN(x,y) a via of type N, cw(c..) or ccw(c..) an arc to the next point about the centre after c; other vN are vias at no path point)
5V: C10.2 C11.2 R3.2 SW1.3 U4.3
5V_CAM: C34.2 C35.2 R4.2 SW2.3 U10.3 UART4.1 UART5.1 USART1.1
5V_DSP: C1.2 C2.2 C4.2 C5.2 C7.2 C8.2 U1.1 U1.3 U2.1 U2.3 U3.1 U3.3
5V_IN: H1.2 H5.2
B3V3: C9.2 C21.1 U3.5 U7.12
C3V3: C12.2 C13.2 H1.1 H5.1 U4.2 U4.4
CLK: J6.3 R9.1 U9.49
CS_6500: H3.4 U8.22
CS_LSM: H4.6 U6.8
DIO: J6.2 R8.1 U9.46
GND: C1.1 C2.1 C3.1 C4.1 C5.1 C6.1 C7.1 C8.1 C9.1 C10.1 C11.1 C12.1 C13.1 C14.1 C15.1 C16.1 C18.2 C19.1 C20.1 C21.2 C22.2 C23.1 C24.1 C25.1 C26.1 C27.1 C28.1 C29.1 C30.1 C31.1 C32.1 C33.1 C34.1 C35.1 C36.1 C37.1 H1.4 H3.2 H5.4 H7.2 J6.5 LED1.2 LED2.2 LED3.2 MOTOR-PWM.5 R2.1 R9.2 R11.1 R12.1 R13.1 R14.1 U1.2 U2.2 U3.2 U4.1 U5.3 U5.4 U5.5 U6.5 U6.10 U6.12 U6.13 U6.16 U7.13 U7.21 U7.22 U8.18 U8.25 U9.12 U9.18 U9.31 U9.47 U9.60 U9.63 U10.1 UART4.4 UART5.4 USART1.4 USART1.5 VBEC?.3
KEY0: R11.2 SW3.5 U9.33
KEY1: R12.2 SW3.6 U9.34
KEY2: R13.2 SW3.7 U9.35
KEY3: R14.2 SW3.8 U9.36
NetC17_1: C17.1 U6.3
NetC17_2: C17.2 U6.2
NetC18_1: C18.1 U6.15
NetC22_1: C22.1 U8.10
NetC30_2: C30.2 C31.2 FB1.2 U9.13
NetLED1_1: LED1.1 R3.1
NetLED2_1: LED2.1 R4.1
NetLED3_1: LED3.1 R7.1
NetR7_2: R7.2 U7.24
NRST: C24.2 J6.4 R10.1 U9.7
OSC_IN: C32.2 U9.5 X1.3
OSC_OUT: C33.2 U9.6 X1.1
PWM_A1: H3.5 MOTOR-PWM.1
PWM_A2: H3.7 MOTOR-PWM.2
PWM_B1: H7.9 MOTOR-PWM.3
PWM_B2: H8.1 MOTOR-PWM.4
RX_BLE: H1.5 U7.1
RX_CAM: H5.5 U9.16
S3V3: C6.2 C15.2 C16.2 C19.2 C20.2 C23.2 U2.5 U5.1 U5.2 U6.14 U8.13
SCL_MS: H6.7 R5.1 U5.8
SDA_MS: H6.9 R6.1 U5.7
SPI_MISO: H4.4 U6.7 U8.9
SPI_MOSI: H4.2 U6.6 U8.24
SPI_SCL: H2.3 U6.4 U8.23
TX_BLE: H1.7 U7.2
TX_CAM: H5.7 U9.17
UART4_RX: U9.52 UART4.3
UART4_TX: U9.51 UART4.2
UART5_RX: U9.54 UART5.3
UART5_TX: U9.53 UART5.2
USART1_RX: U9.43 USART1.3
USART1_TX: U9.42 USART1.2
USART3_RX: U9.30
USART3_TX: U9.29
VBAT: R1.1 VBEC?.2
VBEC: SW1.2 VBEC?.4
VBEC_CAM: SW2.2 VBEC?.1
VCC: C3.2 R5.2 R6.2 U1.5 U6.1 U8.8
VLDT: C14.2 H2.2 R1.2 R2.2
Y3V3: C25.2 C26.2 C27.2 C28.2 C29.2 C36.2 C37.2 FB1.1 J6.1 R8.2 R10.2 SW3.1 SW3.2 SW3.3 SW3.4 U9.1 U9.19 U9.32 U9.48 U9.64 U10.2 U10.4
pads on no net: H1.3 H1.6 H1.8 H1.9 H1.10 H2.1 H2.4 H2.5 H2.6 H2.7 H2.8 H2.9 H2.10 H3.1 H3.3 H3.6 H3.8 H3.9 H3.10 H4.1 H4.3 H4.5 H4.7 H4.8 H4.9 H4.10 H5.3 H5.6 H5.8 H5.9 H5.10 H6.1 H6.2 H6.3 H6.4 H6.5 H6.6 H6.8 H6.10 H7.1 H7.3 H7.4 H7.5 H7.6 H7.7 H7.8 H7.10 H8.2 H8.3 H8.4 H8.5 H8.6 H8.7 H8.8 H8.9 H8.10 SW1.1 SW1.4 SW1.5 SW2.1 SW2.4 SW2.5 U1.4 U2.4 U3.4 U5.6 U6.9 U6.11 U7.3 U7.4 U7.5 U7.6 U7.7 U7.8 U7.9 U7.10 U7.11 U7.14 U7.15 U7.16 U7.17 U7.18 U7.19 U7.20 U7.23 U7.25 U7.26 U7.27 U7.28 U7.29 U7.30 U7.31 U7.32 U7.33 U7.34 U8.1 U8.2 U8.3 U8.4 U8.5 U8.6 U8.7 U8.11 U8.12 U8.14 U8.15 U8.16 U8.17 U8.19 U8.20 U8.21 U9.2 U9.3 U9.4 U9.8 U9.9 U9.10 U9.11 U9.14 U9.15 U9.20 U9.21 U9.22 U9.23 U9.24 U9.25 U9.26 U9.27 U9.28 U9.37 U9.38 U9.39 U9.40 U9.41 U9.44 U9.45 U9.50 U9.55 U9.56 U9.57 U9.58 U9.59 U9.61 U9.62 X1.2 X1.4

## Polygon pours and split planes (outlines as drawn)
no net on PWR03 (split plane): 493 vertices, not listed, extent -2487.47,-2484.97 2487.47,2484.97
GND on GND02 (split plane): 493 vertices, not listed, extent -2595.47,-2210.97 2379.47,2758.97

## Silkscreen, mask and mechanical layers (free items; w line width, h text height)
Top Overlay:
  lines w10: 2100,620 2125,645 ; 2150,620 2125,645 ; 2300,470 2325,495 ; 2300,520 2325,495 ; 2125,645 2125,495 2325,495
  text "Row" at 2165,745 h60 r270
  text "Pitch" at 2350,735 h60 r270
Bottom Solder:
  lines w10: -1127.5,-2265 ccw(c-2267.5,-2265) -2267.5,-1125 ; -1127.5,-1125 -2267.5,-1125 ; -1127.5,1125 -2267.5,1125 ; -1127.5,2265 cw(c-2267.5,2265) -2267.5,1125 ; 1127.5,-2265 cw(c2267.5,-2265) 2267.5,-1125 ; 1127.5,-1125 2267.5,-1125 ; 1127.5,1125 2267.5,1125 ; 1127.5,2265 ccw(c2267.5,2265) 2267.5,1125 ; -2507.5,-885 ccw(c-2267.5,-885) -2267.5,-1125 ; -2507.5,-885 -2267.5,-885 ; -2507.5,-885 -2267.5,-885 ; -2507.5,-885 -2267.5,-885 ; -2507.5,-885 -2507.5,885 ; -2507.5,885 cw(c-2267.5,885) -2267.5,1125 ; -2507.5,885 -2267.5,885 -2267.5,1125 ; -2267.5,-1125 -2267.5,-885 ; 2267.5,-1125 ccw(c2267.5,-885) 2507.5,-885 ; 2267.5,-1125 2267.5,-885 ; 2267.5,-885 2507.5,-885 ; 2267.5,-885 2507.5,-885 ; 2267.5,1125 cw(c2267.5,885) 2507.5,885 ; 2267.5,1125 2267.5,885 2507.5,885 ; 2507.5,-885 2507.5,885
Mechanical 1:
  circle w10: c-887.5,-2265 r137.8
  circle w10: c887.5,-2265 r137.8
  circle w10: c-887.5,2265 r137.8
  circle w10: c887.5,2265 r137.8
  lines w10: -2507.5,0 0,0 ; -887.5,0 887.5,0 ; 0,-125 0,0 ; 0,125 0,0 ; 2507.5,0 0,0 ; -1127.5,2265 cw(c-887.5,2265) -887.5,2505 ; -1127.5,2265 -887.5,2265 ; -1127.5,2265 -1127.5,-2265 ccw(c-887.5,-2265) -887.5,-2505 ; -887.5,-2505 887.5,-2505 ccw(c887.5,-2265) 1127.5,-2265 ; -887.5,-2505 -887.5,-2265 -887.5,2265 ; -887.5,2265 -887.5,2505 ; -887.5,2505 887.5,2505 ; 887.5,2265 887.5,2505 ; 887.5,2265 1127.5,2265 ; 887.5,2265 887.5,-2265 1127.5,-2265 ; 887.5,2505 cw(c887.5,2265) 1127.5,2265 ; 1127.5,-2265 1127.5,2265

## Text inside footprints (layer, text, board x,y; h text height)
SW3: Top Overlay "4" at -580.7,1719.03 h31.5 r235; Top Overlay "3" at -583.55,1610 h31.5 r270; Top Overlay "2" at -583.55,1510 h31.5 r270; Top Overlay "1" at -583.55,1410 h31.5 r270; Top Overlay "NO" at -732.05,1350 h31.5 r90